# Altium PCB MAGI's7SegmentDisplayAutoRoute.PcbDoc
Units mil, origin at the board's own origin, x right, y up, seen from the top; angles counter-clockwise.
Board outline 6000 x 4000 mil, 2 copper layers (Top Layer, Bottom Layer); 13 components, 24 nets, 88 pads, 13 vias.
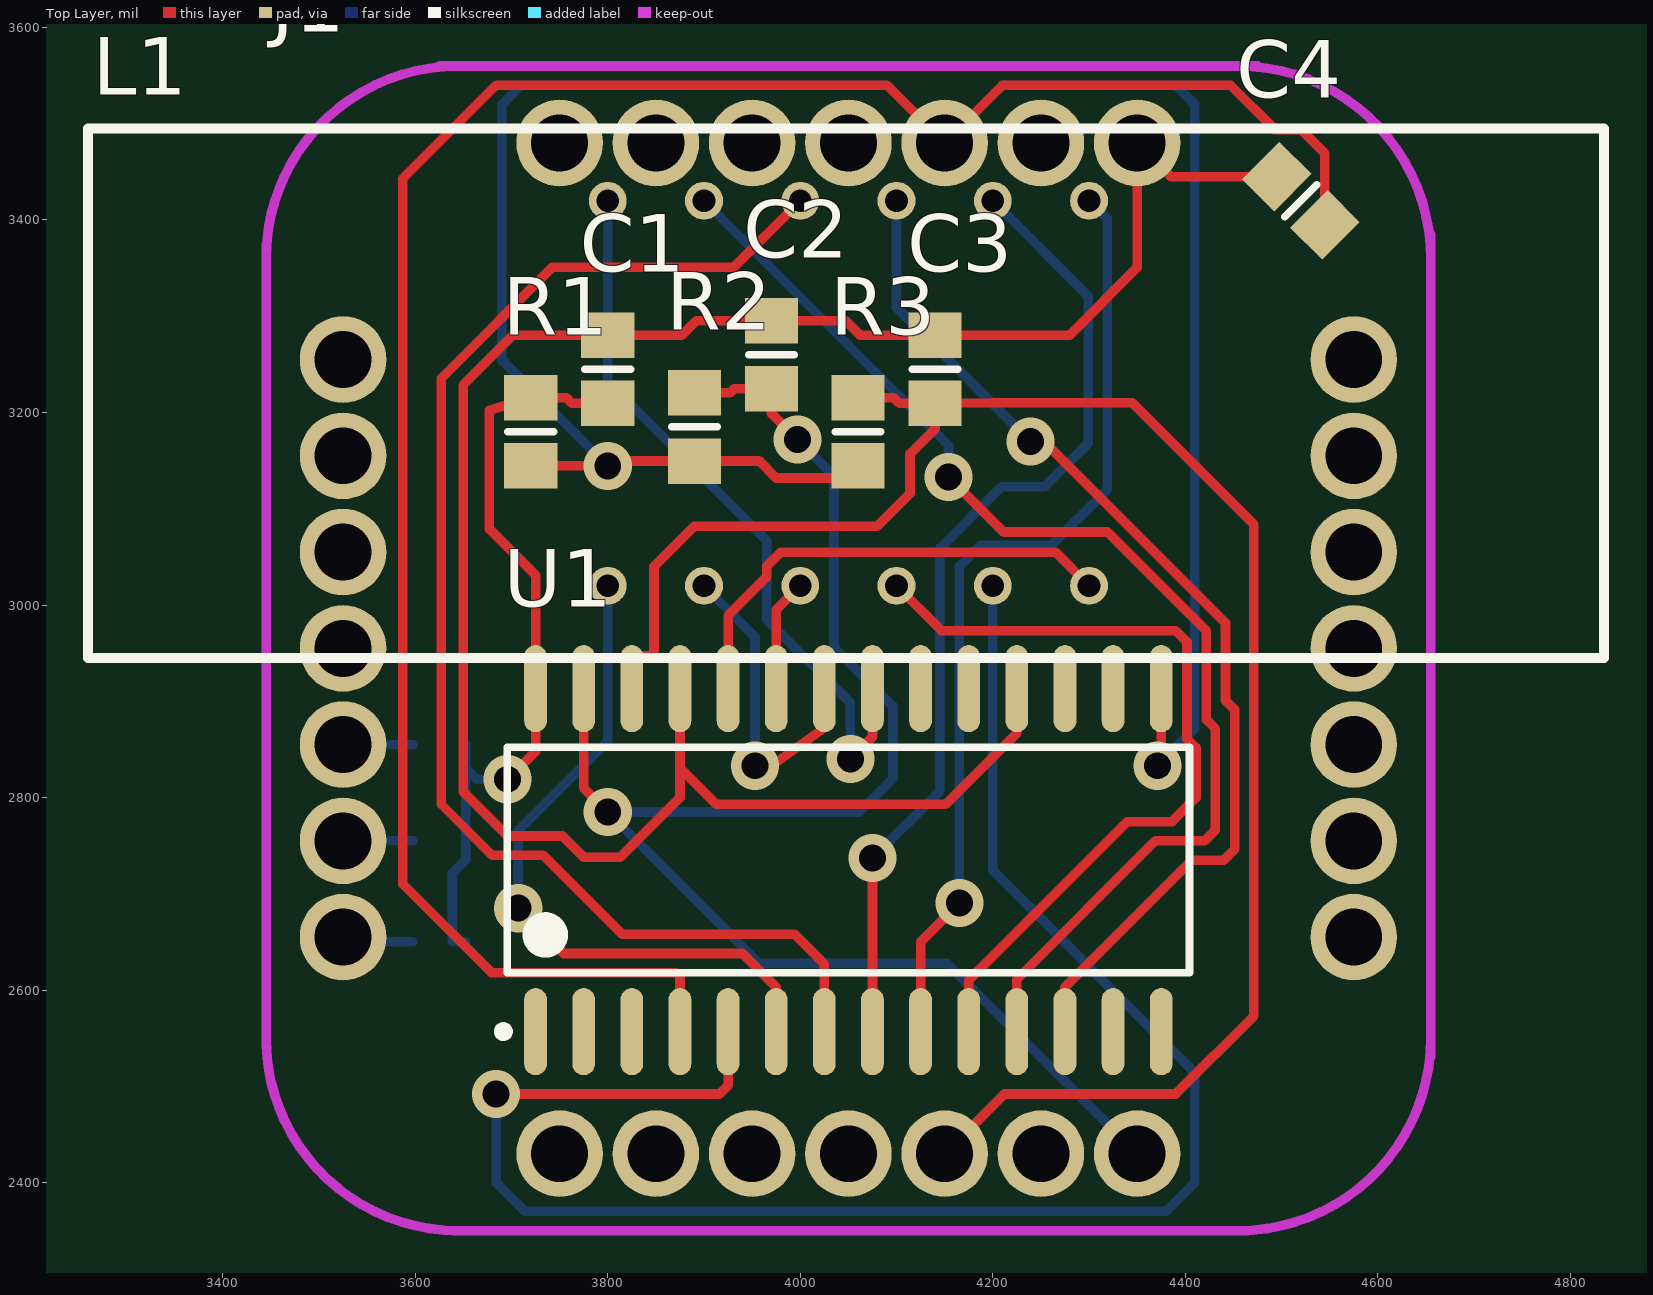
[diagram p0: Top Layer view]
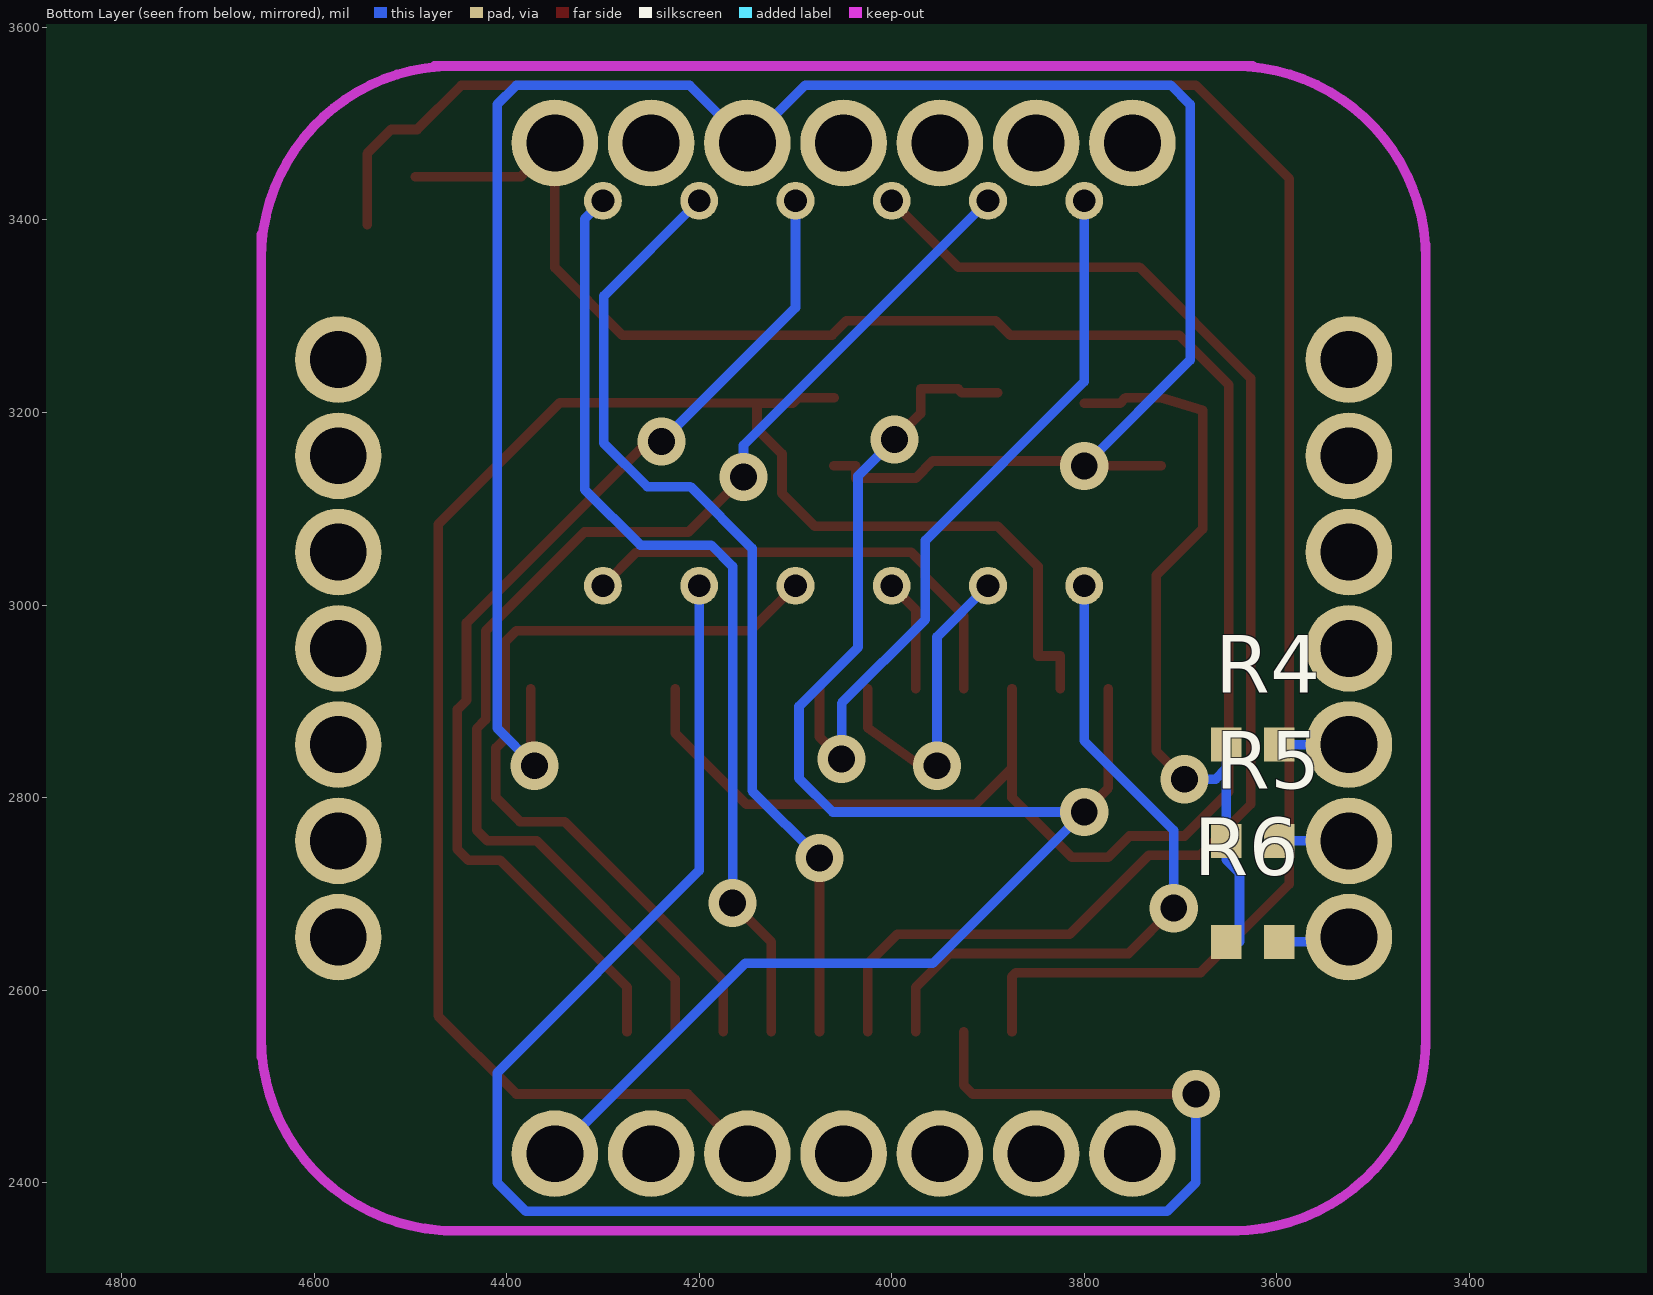
[diagram p1: Bottom Layer view, seen from below]

## Layer stack, top to bottom
Top Layer: signal copper 1.4
Dielectric: dielectric 12.6, FR-4, Dk 4.8
Bottom Layer: signal copper 1.4

## Board outline
1000,1000 7000,1000 7000,5000 1000,5000

## Design rules (kind name [scope] priority, off if disabled: settings)
Clearance [All] p1: gap=10
PolygonConnect [All] p1: connectstyle=Relief reliefconductorwidth=10 reliefentries=4 polygonreliefangle="90 Angle" airgapwidth=10
RoutingVias [All] p1: holewidth=28 width=50 viastyle="Through Hole" minholewidth=28 minwidth=50 maxholewidth=28 maxwidth=50
SolderMaskExpansion [All] p1: expansion=4
Width [All] p1: maxlimit=10 minlimit=10 preferedwidth=10
28 further rules are at their usual default settings.

## Components (designator, comment, footprint, x,y, rotation, side; value= is the part's Value field where it differs from the comment)
C1 "CAP_1" 6-0805_N 3800,3245 r90 top
C2 "CAP_1" 6-0805_N 3970,3260 r270 top
C3 "CAP_1" 6-0805_N 4140,3245 r270 top
C4 "CAP_1" 6-0805_N 4520,3420 r135 top
J1 "MAGI-M8" MAGI-M8 4050,2955 r0 top
L1 "LED4" "0.36\"LED" 4050,3220 r180 top
R1 "RES1" 6-0805_N 3720,3180 r270 top
R2 "RES1" 6-0805_N 3890,3185 r270 top
R3 "RES1" 6-0805_N 4060,3180 r270 top
R4 "RES1" 1608[0603] 3625,2855 r180 bottom
R5 "RES1" 1608[0603] 3625,2755 r180 bottom
R6 "RES1" 1608[0603] 3625,2650 r180 bottom
U1 "TM1638" TM1638 4050,2735 r90 top

## Footprints (in the part's own frame and the unit in brackets; to place one, negate y for a bottom-side part, rotate by r counter-clockwise, add the part's x,y. Pads: shape width x height; smd on the part's side, far side on the other; paste and mask are expansions set on the pad)
"0.36\"LED" [mm]
  round 1 hole 0.6: 1(-6.35,-5.08) 2(-3.81,-5.08) 3(-1.27,-5.08) 4(1.27,-5.08) 5(3.81,-5.08) 6(6.35,-5.08) 7(6.35,5.08) 8(3.81,5.08) 9(1.27,5.08) 10(-1.27,5.08) 11(-3.81,5.08) 12(-6.35,5.08)
  silkscreen extent -19.94,-6.99 20.07,6.99
6-0805_N [mm] "Chip Resistor, Body 2.0x1.2mm, IPC Medium Density"
  rect 1.2x1.4 smd: 1(-0.9,0) 2(0.9,0)
  silkscreen extent 0,-0.6 0,0.6, body extent -1.07,-0.7 1.07,0.7, height 0.7
1608[0603] [mm] "Chip Capacitor, Body 1.6x0.8mm, IPC High Density"
  rect 0.8x0.9 smd: 1(-0.7,0) 2(0.7,0)
  body extent -0.87,-0.48 0.87,0.48, height 1.3
MAGI-M8 [mil]
  round 90 hole 59.06: 1(300,525) 2(200,525) 3(100,525) 4(0,525) 5(-100,525) 6(-200,525) 7(-300,525) 8(-525,300) 9(-525,200) 10(-525,100) 11(-525,0) 12(-525,-100) 13(-525,-200) 14(-525,-300) 15(-300,-525) 16(-200,-525) 17(-100,-525) 18(0,-525) 19(100,-525) 20(200,-525) 21(300,-525) 22(525,-300) 23(525,-200) 24(525,-100) 25(525,0) 26(525,100) 27(525,200) 28(525,300)
  Keep-Out Layer lines w10: -605,-415 -605,290 -605,420 ; -605,-405 ccw(c-405,-405) -405,-605 ; -605,405 cw(c-405,405) -405,605 ; -425,605 425,605 ; -410,-605 415,-605 ; 405,-605 ccw(c405,-405) 605,-405 ; 405,605 cw(c405,405) 605,405 ; 605,-425 605,430
TM1638 [mm] "SOIC, 28-Leads, Body 17.93x7.52mm, Pitch 1.27mm, IPC Medium Density"
  oval 2.3x0.6 smd: 1(-4.525,8.255) 2(-4.525,6.985) 3(-4.525,5.715) 4(-4.525,4.445) 5(-4.525,3.175) 6(-4.525,1.905) 7(-4.525,0.635) 8(-4.525,-0.635) 9(-4.525,-1.905) 10(-4.525,-3.175) 11(-4.525,-4.445) 12(-4.525,-5.715) 13(-4.525,-6.985) 14(-4.525,-8.255) 15(4.525,-8.255) 16(4.525,-6.985) 17(4.525,-5.715) 18(4.525,-4.445) 19(4.525,-3.175) 20(4.525,-1.905) 21(4.525,-0.635) 22(4.525,0.635) 23(4.525,1.905) 24(4.525,3.175) 25(4.525,4.445) 26(4.525,5.715) 27(4.525,6.985) 28(4.525,8.255)
  silkscreen extent -4.65,-9 2.98,9.23, body extent -3.8,-9 3.8,9, height 2.44

## Part data
C1 C2 C3 C4: "Capacitor"

## Via types
v1: diameter 50, hole 28, Top Layer to Bottom Layer, 13 vias

## Nets (pads, with @x,y where several pads share a name; then routed paths per layer and width w, separated by ;. In a path a pad name is that pad's centre, name@x,y a point inside that pad or via, vN(x,y) a via of type N, cw(c..) or ccw(c..) an arc to the next point about the centre after c; other vN are vias at no path point)
CLK: C2.2 J1.21 R2.1 U1.27 | length 1684.9
  Top Layer w10: U1.27 3775,2810 v1(3800,2785) ; R2.1 3927,3220.43 3931.13,3224.57 C2.2 3970,3199 v1(3997,3172)
  Bottom Layer w10: v1(3997,3172) 4035,3134 4035,2956 4096.27,2894.73 4096.27,2820 4061.27,2785 v1(3800,2785) 3957.35,2627.65 4152.35,2627.65 J1.21
DIO: C3.2 J1.19 R3.1 U1.26 | length 1908.8
  Top Layer w10: U1.26 3825,2947 3848,2947 3848,3040 3890,3082 4080,3082 4114,3116 4114,3157 4140,3183 C3.2 ; R3.1 4097,3215.43 4102.87,3209.57 C3.2 ; J1.19 4212,2492 4390,2492 4471.26,2573.26 4471.26,3083.79 4345.05,3210 4199,3210 C3.2
GND: C1.2 C2.1 C3.1 C4.2 J1.1 U1.18 U1.25 | length 2309.3
  Top Layer w10: U1.25 3875,2830.68 ; U1.18 4225,2867 4150.87,2792.87 3912.81,2792.87 3875,2830.68 ; C4.2 4384.95,3445.05 J1.1 4350,3350.43 4280,3280.43 C3.1 4062,3280.43 4047,3295.43 C2.1 3892,3295.43 3877,3280.43 C1.2 3701.43,3280.43 3650,3229 3650,2805.87 3695.87,2760 3753,2760 3775,2738 3813,2738 3875,2800 3875,2830.68
GRID1: L1.12 U1.24 | length 499.1
  Top Layer w10: U1.24 3925,2989 3965,3029 3965,3040 3980,3055 4265,3055 L1.12
GRID2: L1.9 U1.23 | length 117.2
  Top Layer w10: U1.23 3975,2995 L1.9
GRID3: L1.8 U1.22 | length 334.4
  Top Layer w10: v1(3953,2833) 3970.13,2833 4025,2872.45 U1.22
  Bottom Layer w10: L1.8 3953,2967 v1(3953,2833)
GRID4: L1.6 U1.21 | length 767.1
  Top Layer w10: v1(4052,2840) 4075,2863 U1.21
  Bottom Layer w10: L1.6 3800,3232 3965,3067 3965,2985 4052,2898 v1(4052,2840)
GRID5: U1.20
GRID6: U1.19
GRID7: U1.17
GRID8: U1.16
NetJ1_12: J1.12 R4.2 | length 72.4
  Bottom Layer w10: J1.12 R4.2
NetJ1_13: J1.13 R5.2 | length 72.4
  Bottom Layer w10: J1.13 R5.2
NetJ1_14: J1.14 R6.2 | length 74.5
  Bottom Layer w10: J1.14 3530,2650 R6.2
SEG1: L1.11 U1.5 | length 1850.4
  Top Layer w10: v1(3684,2492) 3916,2492 3925,2501 U1.5
  Bottom Layer w10: v1(3684,2492) 3684,2400 3714,2370 4380,2370 4410,2400 4410,2514 4200,2724 L1.11
SEG2: L1.7 U1.6 | length 721.6
  Top Layer w10: v1(3707,2685) 3754,2638 3940,2638 3975,2603 U1.6
  Bottom Layer w10: v1(3707,2685) 3707,2765.87 3800,2858.87 L1.7
SEG3: L1.4 U1.7 | length 1428.7
  Top Layer w10: L1.4 3931,3351 3742.73,3351 3627,3235.27 3627,2793 3680,2740 3733,2740 3815,2658 3994,2658 4025,2627 U1.7
SEG4: L1.2 U1.8 | length 1023.2
  Top Layer w10: U1.8 v1(4075,2737)
  Bottom Layer w10: v1(4075,2737) 4145,2807 4145,3058.88 4209.12,3123 4254,3123 4299,3168 4299,3321 L1.2
SEG5: L1.1 U1.9 | length 994.5
  Top Layer w10: U1.9 4125,2650 v1(4165.31,2690.31)
  Bottom Layer w10: v1(4165.31,2690.31) 4165.31,3040 4187.51,3062.19 4261.19,3062.19 4319,3120 4319,3401 L1.1
SEG6: L1.10 U1.10 | length 859.6
  Top Layer w10: L1.10 4146.57,2973.43 4390,2973.43 4401.81,2961.61 4401.81,2860.9 4411.26,2851.45 4411.26,2800 4386.21,2774.94 4339.94,2774.94 4175,2610 U1.10
SEG7: L1.5 U1.11 | length 1261.9
  Top Layer w10: v1(4154,3133) 4211.2,3075.8 4319.2,3075.8 4421.81,2973.19 4421.81,2880.9 4431.26,2871.45 4431.26,2766.21 4420,2754.94 4368.76,2754.94 4225,2611.19 U1.11
  Bottom Layer w10: L1.5 4154,3166 v1(4154,3133)
SEG8: L1.3 U1.12 | length 1109.4
  Top Layer w10: v1(4239,3170) 4253.29,3170 4441.81,2981.47 4441.81,2900.9 4451.26,2891.45 4451.26,2746.21 4440,2734.94 4406.94,2734.94 4275,2603 U1.12
  Bottom Layer w10: L1.3 4100,3309 v1(4239,3170)
STB: C1.1 R1.1 R4.1 R5.1 R6.1 U1.28 | length 815.3
  Top Layer w10: v1(3696,2819) 3725,2848 U1.28 3725,3031 3677,3079 3677,3202.43 R1.1 3757,3215.43 3762.87,3209.57 C1.1
  Bottom Layer w10: R6.1 3638.72,2650 3638.72,2721.59 3652.56,2735.43 R5.1 3652.56,2830 ; R4.1 3652.56,2830 ; v1(3696,2819) 3663.56,2819 3652.56,2830
VCC: C4.1 J1.3 R1.2 R2.2 R3.2 U1.4 U1.15 | length 4623.4
  Top Layer w10: R1.2 v1(3800,3144.57) 3802,3144.57 3807,3149.57 R2.2 3957.44,3149.57 3975.01,3132 4037.44,3132 4037.44,3144.57 R3.2 ; U1.4 3875,2614 3871,2618 3679,2618 3587,2710 3587,3443 3684,3540 4090,3540 J1.3 4210,3540 4447,3540 4493,3494 4520,3494 4545.05,3468.95 C4.1 ; v1(4371,2833) 4375,2837 U1.15
  Bottom Layer w10: v1(3800,3144.57) 3690,3254.57 3690,3520 3710,3540 4090,3540 J1.3 4210,3540 4390,3540 4410,3520 4410,2872 v1(4371,2833)
pads on no net: J1.2 J1.4 J1.5 J1.6 J1.7 J1.8 J1.9 J1.10 J1.11 J1.15 J1.16 J1.17 J1.18 J1.20 J1.22 J1.23 J1.24 J1.25 J1.26 J1.27 J1.28 U1.1 U1.2 U1.3 U1.13 U1.14